# EAGLE board CT_schematic (EAGLE 7.6.0)

Size 100 x 80 mm. Coordinates in mm from the lower left corner, seen from the top.
Outline: 0,0 100,0 100,80 0,80 0,0
Copper layers (1*16): Top 0.035mm / dielectric 1.5mm / Bottom 0.035mm
Design rules "default": minimum track width 10mil, minimum drill 24mil, track to track 8mil, track to pad 8mil, pad to pad 8mil, via to via 8mil, smd to smd 8mil, copper to edge 40mil, drill to drill 8mil, minimum pad ring 10mil, minimum via ring 8mil, stop-mask expansion 4mil, vias tented up to drill 0mil, thermal gap 10mil

## Footprints (pad centres in the part's own frame; a part is rotated, then mirrored left to right if it is on the bottom)
C0603 = smd 0.8 x 0.8: 1 -0.762,0; 2 0.762,0
C0402 = smd 0.5 x 0.5: 1 -0.508,0; 2 0.508,0
C1210 = smd 1.2 x 2.5: 1 -1.524,0; 2 1.524,0
C0805 = smd 1.2 x 1.3: 1 -1.016,0; 2 1.016,0
C1206 = smd 1.3 x 1.6: 1 -1.524,0; 2 1.524,0
DR1040 = smd 1.6 x 3.2: 1 -4.458,0; 2 4.458,0
R0603 = smd 0.8 x 0.8: 1 -0.762,0; 2 0.762,0
LQFP100 = smd 0.3 x 1.2: 1 -6,-7.75; 2 -5.5,-7.75; 3 -5,-7.75; 4 -4.5,-7.75; 5 -4,-7.75; 6 -3.5,-7.75; 7 -3,-7.75; 8 -2.5,-7.75; 9 -2,-7.75; 10 -1.5,-7.75; 11 -1,-7.75; 12 -0.5,-7.75; 13 0,-7.75; 14 0.5,-7.75; 15 1,-7.75; 16 1.5,-7.75; 17 2,-7.75; 18 2.5,-7.75; 19 3,-7.75; 20 3.5,-7.75; 21 4,-7.75; 22 4.5,-7.75; 23 5,-7.75; 24 5.5,-7.75; 25 6,-7.75; 51 6,7.75; 52 5.5,7.75; 53 5,7.75; 54 4.5,7.75; 55 4,7.75; 56 3.5,7.75; 57 3,7.75; 58 2.5,7.75; 59 2,7.75; 60 1.5,7.75; 61 1,7.75; 62 0.5,7.75; 63 0,7.75; 64 -0.5,7.75; 65 -1,7.75; 66 -1.5,7.75; 67 -2,7.75; 68 -2.5,7.75; 69 -3,7.75; 70 -3.5,7.75; 71 -4,7.75; 72 -4.5,7.75; 73 -5,7.75; 74 -5.5,7.75; 75 -6,7.75 | smd 1.2 x 0.3: 26 7.75,-6; 27 7.75,-5.5; 28 7.75,-5; 29 7.75,-4.5; 30 7.75,-4; 31 7.75,-3.5; 32 7.75,-3; 33 7.75,-2.5; 34 7.75,-2; 35 7.75,-1.5; 36 7.75,-1; 37 7.75,-0.5; 38 7.75,0; 39 7.75,0.5; 40 7.75,1; 41 7.75,1.5; 42 7.75,2; 43 7.75,2.5; 44 7.75,3; 45 7.75,3.5; 46 7.75,4; 47 7.75,4.5; 48 7.75,5; 49 7.75,5.5; 50 7.75,6; 76 -7.75,6; 77 -7.75,5.5; 78 -7.75,5; 79 -7.75,4.5; 80 -7.75,4; 81 -7.75,3.5; 82 -7.75,3; 83 -7.75,2.5; 84 -7.75,2; 85 -7.75,1.5; 86 -7.75,1; 87 -7.75,0.5; 88 -7.75,0; 89 -7.75,-0.5; 90 -7.75,-1; 91 -7.75,-1.5; 92 -7.75,-2; 93 -7.75,-2.5; 94 -7.75,-3; 95 -7.75,-3.5; 96 -7.75,-4; 97 -7.75,-4.5; 98 -7.75,-5; 99 -7.75,-5.5; 100 -7.75,-6
SOIC-8 = smd 1.6 x 0.6: 1 -2.7,1.905 | smd 1.55 x 0.6: 2 -2.7,0.635; 3 -2.7,-0.635; 4 -2.7,-1.905; 5 2.7,-1.905; 6 2.7,-0.635; 7 2.7,0.635; 8 2.7,1.905
TST-110-05-T-D-RA = drill 1 pad 1.7 square: 1 0,0 | drill 1 pad 1.7: 2 0,2.54; 3 2.54,0; 4 2.54,2.54; 5 5.08,0; 6 5.08,2.54; 7 7.62,0; 8 7.62,2.54; 9 10.16,0; 10 10.16,2.54; 11 12.7,0; 12 12.7,2.54; 13 15.24,0; 14 15.24,2.54; 15 17.78,0; 16 17.78,2.54; 17 20.32,0; 18 20.32,2.54; 19 22.86,0; 20 22.86,2.54
XCVR_SPBTLE-RF = smd 1.6 x 1: 1 -6.75,0.33; 2 -6.75,-0.94; 3 -6.75,-2.21; 4 -6.75,-3.48; 5 -6.75,-4.75; 7 6.75,-4.75; 8 6.75,-3.48; 9 6.75,-2.21; 10 6.75,-0.94; 11 6.75,0.33 | smd 1 x 1.6: 6 -2.75,-5.75
FCI_10118193-0001LF = smd 0.4 x 1.35: 1 -1.3,2.675; 2 -0.65,2.675; 3 0,2.675; 4 0.65,2.675; 5 1.3,2.675 | smd 1.6 x 1.4: 6 -3.2,2.45; 7 3.2,2.45 | smd 1.9 x 1.9: 8 -1.2,0; 9 1.2,0 | hole 0.5: -3.3,0; 3.3,0
SOT143B = smd 1 x 0.7: 1 -0.75,-1 | smd 0.6 x 0.7: 2 0.95,-1; 3 0.95,1; 4 -0.95,1
QFN-28 = smd 0.813 x 0.305: 1 -2.451,1.5; 2 -2.451,1; 3 -2.451,0.5; 4 -2.451,0; 5 -2.451,-0.5; 6 -2.451,-1; 7 -2.451,-1.5; 15 2.451,-1.5; 16 2.451,-1; 17 2.451,-0.5; 18 2.451,0; 19 2.451,0.5; 20 2.451,1; 21 2.451,1.5 | smd 0.305 x 0.813: 8 -1.5,-2.451; 9 -1,-2.451; 10 -0.5,-2.451; 11 0,-2.451; 12 0.5,-2.451; 13 1,-2.451; 14 1.5,-2.451; 22 1.5,2.451; 23 1,2.451; 24 0.5,2.451; 25 0,2.451; 26 -0.5,2.451; 27 -1,2.451; 28 -1.5,2.451 | smd 3.607 x 3.607: 29 0,0
SJ-43515TS-SMT-TR = smd 2.2 x 3: 1 0.6,-7.4; 4 3.4,-7.4 | smd 3 x 3: 2 12.8,-7.4; 5 17,-3 | smd 2 x 3: 3 5.3,0; 6 2.5,0 | drill 1.8: P$7 4.5,-3.69; P$8 11.54,-3.69
ABLS-25.000MHZ-B2F-T = smd 5.6 x 2.8: 1 -3.81,0; 2 5.69,0
ASEK = smd 1.4 x 1: 1 -1.1,-0.8; 2 1.1,-0.8; 3 1.1,0.8; 4 -1.1,0.8
ASFL1 = smd 1.7 x 1.5: 1 -1.27,-1.1; 2 1.27,-1.1; 3 1.27,1.1; 4 -1.27,1.1
TSOT-23-5 = smd 1.3 x 0.62: 1 -1.31,0.95; 2 -1.31,0; 3 -1.31,-0.95; 4 1.31,-0.95; 5 1.31,0.95
DFN8_2X3MC = smd 0.813 x 0.305: 1 -1.398,0.75; 2 -1.398,0.25; 3 -1.398,-0.25; 4 -1.398,-0.75; 5 1.398,-0.75; 6 1.398,-0.25; 7 1.398,0.25; 8 1.398,0.75 | smd 1.753 x 1.549: 9 0,0
JST-2-SMD = smd 1 x 4.6: 1 -1,-3.7; 2 1,-3.7 | smd 1.6 x 3.4: NC1 -3.4,1.5; NC2 3.4,1.5
SON-6 = smd 0.55 x 0.3: 1 -0.355,0.5 | smd 0.52 x 0.3: 2 -0.37,0; 3 -0.37,-0.5; 4 0.37,-0.5; 5 0.37,0; 6 0.37,0.5
SW_4-1437565-2 = smd 1.4 x 2.1: 1 -2.23,4.55; 2 -2.23,-4.55; 3 2.23,4.55; 4 2.23,-4.55
LGM67K-G1J2-24-Z = smd 0.8 x 1.4: A -2,0; C 0,0
NC7SZ125M5X = smd 1.3 x 0.7: 1 -1.3,0.95; 2 -1.3,0; 3 -1.3,-0.95; 4 1.3,-0.95; 5 1.3,0.95

## Placement (x,y rotation side)
C1  1e-07  [C0603]  -63.5,73.66 0 top  (outside the outline)
C2  1e-07  [C0603]  -67.31,73.66 0 top  (outside the outline)
C3  1e-07  [C0603]  -71.12,73.66 0 top  (outside the outline)
C4  1e-07  [C0603]  -74.93,73.66 0 top  (outside the outline)
C5  1e-07  [C0603]  -78.74,73.66 0 top  (outside the outline)
C6  4.7e-06  [C0603]  -59.69,73.66 0 top  (outside the outline)
C7  1e-07  [C0603]  -15.24,78.74 0 top  (outside the outline)
C8  1e-08  [C0603]  -19.05,78.74 0 top  (outside the outline)
C9  1e-06  [C0603]  -22.86,78.74 0 top  (outside the outline)
C10  1e-11  [C0402]  -53.34,78.74 0 top  (outside the outline)
C11  1e-11  [C0402]  -57.15,78.74 0 top  (outside the outline)
C12  1e-08  [C0402]  -60.96,78.74 0 top  (outside the outline)
C13  1e-07  [C0402]  -64.77,78.74 0 top  (outside the outline)
C14  1e-07  [C0402]  -68.58,78.74 0 top  (outside the outline)
C15  1e-06  [C0603]  -26.67,78.74 0 top  (outside the outline)
C16  1e-07  [C0402]  -72.39,78.74 0 top  (outside the outline)
C17  2.2e-05  [C1210]  -58.42,55.88 0 top  (outside the outline)
C18  2.2e-05  [C1210]  -64.77,55.88 0 top  (outside the outline)
C19  1e-09  [C0402]  -76.2,78.74 0 top  (outside the outline)
C20  1e-09  [C0402]  -80.01,78.74 0 top  (outside the outline)
C21  1e-07  [C0402]  -15.24,83.82 0 top  (outside the outline)
C22  1e-07  [C0402]  -19.05,83.82 0 top  (outside the outline)
C23  1e-07  [C0402]  -22.86,83.82 0 top  (outside the outline)
C24  1e-07  [C0402]  -26.67,83.82 0 top  (outside the outline)
C25  1e-07  [C0402]  -30.48,83.82 0 top  (outside the outline)
C26  1e-05  [C0805]  -34.29,62.23 0 top  (outside the outline)
C27  1e-05  [C0805]  -39.37,62.23 0 top  (outside the outline)
C28  1e-05  [C0805]  -44.45,62.23 0 top  (outside the outline)
C29  1e-05  [C0805]  -49.53,62.23 0 top  (outside the outline)
C30  1e-05  [C0805]  -54.61,62.23 0 top  (outside the outline)
C31  1e-08  [C0402]  -34.29,83.82 0 top  (outside the outline)
C32  1e-08  [C0402]  -38.1,83.82 0 top  (outside the outline)
C33  1e-05  [C0805]  -59.69,62.23 0 top  (outside the outline)
C34  1e-05  [C0805]  -64.77,62.23 0 top  (outside the outline)
C35  1e-07  [C0402]  -41.91,83.82 0 top  (outside the outline)
C36  1e-05  [C1206]  -71.12,54.61 0 top  (outside the outline)
C37  1e-05  [C1206]  -77.47,54.61 0 top  (outside the outline)
C38  1e-08  [C0402]  -45.72,83.82 0 top  (outside the outline)
C39  1e-08  [C0402]  -49.53,83.82 0 top  (outside the outline)
C40  1e-08  [C0402]  -53.34,83.82 0 top  (outside the outline)
I1  3.8e-06  [DR1040]  -66.04,24.13 0 top  (outside the outline)
R2  1000.0  [R0603]  -30.48,78.74 0 top  (outside the outline)
R4  4700.0  [R0603]  -34.29,78.74 0 top  (outside the outline)
R5  4700.0  [R0603]  -38.1,78.74 0 top  (outside the outline)
R6  10000.0  [R0603]  -35.56,68.58 0 top  (outside the outline)
R7  10000.0  [R0603]  -40.64,68.58 0 top  (outside the outline)
R8  10000.0  [R0603]  -45.72,68.58 0 top  (outside the outline)
R9  10000.0  [R0603]  -50.8,68.58 0 top  (outside the outline)
R10  10000.0  [R0603]  -55.88,68.58 0 top  (outside the outline)
R11  10000.0  [R0603]  -60.96,68.58 0 top  (outside the outline)
R12  10000.0  [R0603]  -66.04,68.58 0 top  (outside the outline)
R13  10000.0  [R0603]  -71.12,68.58 0 top  (outside the outline)
R14  10000.0  [R0603]  -76.2,68.58 0 top  (outside the outline)
R15  10000.0  [R0603]  -15.24,73.66 0 top  (outside the outline)
R16  10000.0  [R0603]  -20.32,73.66 0 top  (outside the outline)
R17  100000.0  [R0603]  -15.24,68.58 0 top  (outside the outline)
R18  47000.0  [R0603]  -25.4,73.66 0 top  (outside the outline)
R19  47000.0  [R0603]  -30.48,73.66 0 top  (outside the outline)
R20  47000.0  [R0603]  -35.56,73.66 0 top  (outside the outline)
R21  47000.0  [R0603]  -40.64,73.66 0 top  (outside the outline)
R22  680.0  [R0603]  -41.91,78.74 0 top  (outside the outline)
R23  220000.0  [R0603]  -20.32,68.58 0 top  (outside the outline)
R24  1000000.0  [R0603]  -77.47,62.23 0 top  (outside the outline)
R25  10000.0  [R0603]  -45.72,73.66 0 top  (outside the outline)
R26  10000.0  [R0603]  -50.8,73.66 0 top  (outside the outline)
R27  9100.0  [R0603]  -45.72,78.74 0 top  (outside the outline)
R28  680000.0  [R0603]  -25.4,68.58 0 top  (outside the outline)
R29  120000.0  [R0603]  -30.48,68.58 0 top  (outside the outline)
R30  2000.0  [R0603]  -49.53,78.74 0 top  (outside the outline)
R31  10000.0  [R0603]  -55.88,73.66 0 top  (outside the outline)
U1  STM32L162VCTx  [LQFP100]  -40.64,8.89 0 top  (outside the outline)
U2  AT25020B-SSHL-T  [SOIC-8]  -39.37,38.1 0 top  (outside the outline)
U3  TST-110-05-T-D-RA  [TST-110-05-T-D-RA]  -46.99,45.72 0 top  (outside the outline)
U4  SPBTLE-RF  [XCVR_SPBTLE-RF]  -21.59,10.16 0 top  (outside the outline)
U5  10118193-0001LF  [FCI_10118193-0001LF]  -69.85,36.83 0 top  (outside the outline)
U6  prtr5v0u2ax  [SOT143B]  -66.04,83.82 0 top  (outside the outline)
U7  WM8731CLSEFL  [QFN-28]  -50.8,55.88 0 top  (outside the outline)
U8  SJ-43515TS-SMT-TR  [SJ-43515TS-SMT-TR]  -76.2,10.16 0 top  (outside the outline)
U9  SJ-43515TS-SMT-TR  [SJ-43515TS-SMT-TR]  -39.37,27.94 0 top  (outside the outline)
U10  ABLS-25.000MHZ-B2F-T  [ABLS-25.000MHZ-B2F-T]  -26.67,55.88 0 top  (outside the outline)
U11  ASEK-32.768KHz-ECST  [ASEK]  -66.04,48.26 0 top  (outside the outline)
U12  ASFL1-12.288MHZ-EC-T  [ASFL1]  -60.96,38.1 0 top  (outside the outline)
U13  ltc3406es5  [TSOT-23-5]  -69.85,62.23 0 top  (outside the outline)
U14  MCP73831T-2ACI/MC  [DFN8_2X3MC]  -76.2,82.55 0 top  (outside the outline)
U15  S2B-PH-SM4-TB(LF)(SN)  [JST-2-SMD]  -22.86,39.37 0 top  (outside the outline)
U16  TPS3895ADRYR  [SON-6]  -69.85,82.55 0 top  (outside the outline)
U17  4-1437565-2  [SW_4-1437565-2]  -55.88,24.13 0 top  (outside the outline)
U18  Q65110A2395  [LGM67K-G1J2-24-Z]  -38.1,55.88 0 top  (outside the outline)
U19  nc7sz125m5x  [NC7SZ125M5X]  -15.24,62.23 0 top  (outside the outline)
U20  nc7sz125m5x  [NC7SZ125M5X]  -21.59,62.23 0 top  (outside the outline)
U21  nc7sz125m5x  [NC7SZ125M5X]  -27.94,62.23 0 top  (outside the outline)

## Library data of the parts
C1-C40 I1 R2 R4-R31 U1-U21 = circuit_tree

## Nets
CLK_CRYSTAL_U1_12: C10.1 U1.12 U10.1
CLK_CRYSTAL_U1_13: C11.1 U1.13 U10.2
CLK_U1_8: U1.8 U11.3
CLK_U7_1: U7.1 U12.3
GND: C1.2 C2.2 C3.2 C4.2 C5.2 C6.2 C7.2 C8.2 C9.2 C10.2 C11.2 C12.2 C13.2 C14.2 C15.2 C16.2 C20.2 C21.2 C22.2 C23.2 C24.2 C25.2 C26.2 C27.2 C28.2 C29.2 C30.2 C31.2 C32.2 C33.2 C34.1 C34.2 C35.2 C36.2 C37.2 C38.2 C39.2 C40.2 R2.2 R6.2 R15.2 R17.2 R18.2 R19.2 R20.2 R21.2 R23.2 R27.2 R29.2 R30.2 U1.10 U1.19 U1.20 U1.27 U1.49 U1.74 U1.99 U2.4 U3.4 U3.6 U3.8 U3.10 U3.12 U3.14 U3.16 U3.18 U3.20 U4.6 U5.5 U5.6 U5.7 U5.8 U5.9 U6.1 U7.4 U7.15 U7.19 U7.25 U7.26 U7.29 U8.1 U9.1 U11.2 U12.2 U13.2 U14.6 U14.9 U15.2 U16.2 U18.C U19.2 U19.3 U20.1 U20.3 U21.1 U21.3
INPUT_USBPOWER_5V: C36.1 R31.2 U5.1 U6.4 U14.1 U14.2
NET_U1_6: C7.1 U1.6
NET_U1_14: R5.1 U1.14 U21.4
NET_U1_22: C8.1 C9.1 U1.21 U1.22
NET_U1_94: R6.1 U1.94
NET_U1_97: U18.A
NET_U1_98: U17.3 U17.4
NET_U2_3: R7.1 U2.3
NET_U2_7: R9.1 U2.7
NET_U3_19: R15.1 U3.19
NET_U4_11: R4.1 U4.11 U20.4
NET_U7_9: U7.9
NET_U7_20: C25.1 C30.1 U7.20
NET_U8_2: C18.1 R20.1 U8.2
NET_U8_5: C17.1 R19.1 U8.5
NET_U8_13: C17.2
NET_U8_14: C18.2
NET_U9_5: C19.1 C20.1 R21.1 R22.1 U9.5
NET_U9_21: R22.2
NET_U9_22: C19.2
NET_U13_1: U13.1
NET_U13_3: I1.1 U13.3
NET_U13_5: R23.1 R24.1 U13.5
NET_U13_ATNET_3: I1.2 R24.2
NET_U14_5: R31.1 U14.5
NET_U14_8: R30.1 U14.8
NET_U16_1: R26.1 R27.1 U16.1
NET_U16_3: R28.2 R29.1 U16.3
NET_U16_4: R25.1 U16.4 U19.4 U20.2 U21.2
NET_U17_1: R2.1 U17.1 U17.2
PROC_GPIO_TO_U4_SPI_IRQ: R18.1 U1.1 U4.4
PROC_I2S2_CK: U1.82 U7.7
PROC_I2S2_SD: U1.85 U7.8
PROC_I2S2_WS: U1.81 U7.9 U7.11
PROC_SPI1_MISO: U1.31 U4.8
PROC_SPI1_MOSI: U1.32 U4.9
PROC_SPI1_NSS: R16.1 U1.29 U4.10
PROC_SPI1_SCK: R17.1 U1.30 U4.7
PROC_SPI2_MISO: U1.53 U2.2
PROC_SPI2_MOSI: U1.54 U2.5
PROC_SPI2_NSS: R8.1 U1.51 U2.1
PROC_SPI2_SCK: U1.52 U2.6
PROC_SYS_JTCK_SWCLK: R13.1 U1.76 U3.9
PROC_SYS_JTDI: R11.1 U1.77 U3.5
PROC_SYS_JTDO_TRACESWO: U1.89 U3.13
PROC_SYS_JTMS_SWDIO: R12.1 U1.72 U3.7
PROC_SYS_JTRST: R10.1 U1.90 U3.3
PROC_USB_DM: U1.70 U5.2 U6.3
PROC_USB_DP: U1.71 U5.3 U6.2
RST_OUT_U3_SRESET_B: R14.1 U3.15 U19.1
VCC_S1_3V7: C33.1 C37.1 U13.4 U14.3 U14.4 U15.1
VCC_TIER1_3V3: C1.1 C2.1 C3.1 C4.1 C5.1 C6.1 C12.1 C13.1 C14.1 C15.1 C16.1 C21.1 C22.1 C23.1 C24.1 C26.1 C27.1 C28.1 C29.1 C31.1 C32.1 C34.2 C35.1 C38.1 C39.1 C40.1 I1.2 R4.2 R5.2 R7.2 R8.2 R9.2 R10.2 R11.2 R12.2 R13.2 R14.2 R16.2 R24.2 R25.2 R26.2 R28.1 U1.11 U1.28 U1.50 U1.75 U1.100 U2.8 U3.1 U3.2 U4.5 U7.3 U7.5 U7.12 U7.18 U11.4 U12.4 U16.6 U19.5 U20.5 U21.5

## Tracks (layer width: path | path; a pad name or v marks a point on that pad's centre or on a via)
CLK_CRYSTAL_U1_12  (2 unrouted)
CLK_CRYSTAL_U1_13  (2 unrouted)
CLK_U1_8  (1 unrouted)
CLK_U7_1  (1 unrouted)
GND  (95 unrouted)
INPUT_USBPOWER_5V  (5 unrouted)
NET_U1_6  (1 unrouted)
NET_U1_14  (2 unrouted)
NET_U1_22  (3 unrouted)
NET_U1_94  (1 unrouted)
NET_U1_98  (1 unrouted)
NET_U2_3  (1 unrouted)
NET_U2_7  (1 unrouted)
NET_U3_19  (1 unrouted)
NET_U4_11  (2 unrouted)
NET_U7_20  (2 unrouted)
NET_U8_2  (2 unrouted)
NET_U8_5  (2 unrouted)
NET_U9_5  (4 unrouted)
NET_U13_3  (1 unrouted)
NET_U13_5  (2 unrouted)
NET_U13_ATNET_3  (1 unrouted)
NET_U14_5  (1 unrouted)
NET_U14_8  (1 unrouted)
NET_U16_1  (2 unrouted)
NET_U16_3  (2 unrouted)
NET_U16_4  (4 unrouted)
NET_U17_1  (2 unrouted)
PROC_GPIO_TO_U4_SPI_IRQ  (2 unrouted)
PROC_I2S2_CK  (1 unrouted)
PROC_I2S2_SD  (1 unrouted)
PROC_I2S2_WS  (2 unrouted)
PROC_SPI1_MISO  (1 unrouted)
PROC_SPI1_MOSI  (1 unrouted)
PROC_SPI1_NSS  (2 unrouted)
PROC_SPI1_SCK  (2 unrouted)
PROC_SPI2_MISO  (1 unrouted)
PROC_SPI2_MOSI  (1 unrouted)
PROC_SPI2_NSS  (2 unrouted)
PROC_SPI2_SCK  (1 unrouted)
PROC_SYS_JTCK_SWCLK  (2 unrouted)
PROC_SYS_JTDI  (2 unrouted)
PROC_SYS_JTDO_TRACESWO  (1 unrouted)
PROC_SYS_JTMS_SWDIO  (2 unrouted)
PROC_SYS_JTRST  (2 unrouted)
PROC_USB_DM  (2 unrouted)
PROC_USB_DP  (2 unrouted)
RST_OUT_U3_SRESET_B  (2 unrouted)
VCC_S1_3V7  (5 unrouted)
VCC_TIER1_3V3  (60 unrouted)